# Altium PCB NTC_Extension_6Fach.PcbDoc
Units mm, origin at the board's own origin, x right, y up, seen from the top; angles counter-clockwise.
Board outline 173.75 x 78.79 mm, 2 copper layers (Top Side, not used), stack 0.3 mm thick; 7 components, 13 nets, 34 pads, 0 vias.
Unrouted connection lines stored in the file: 21.
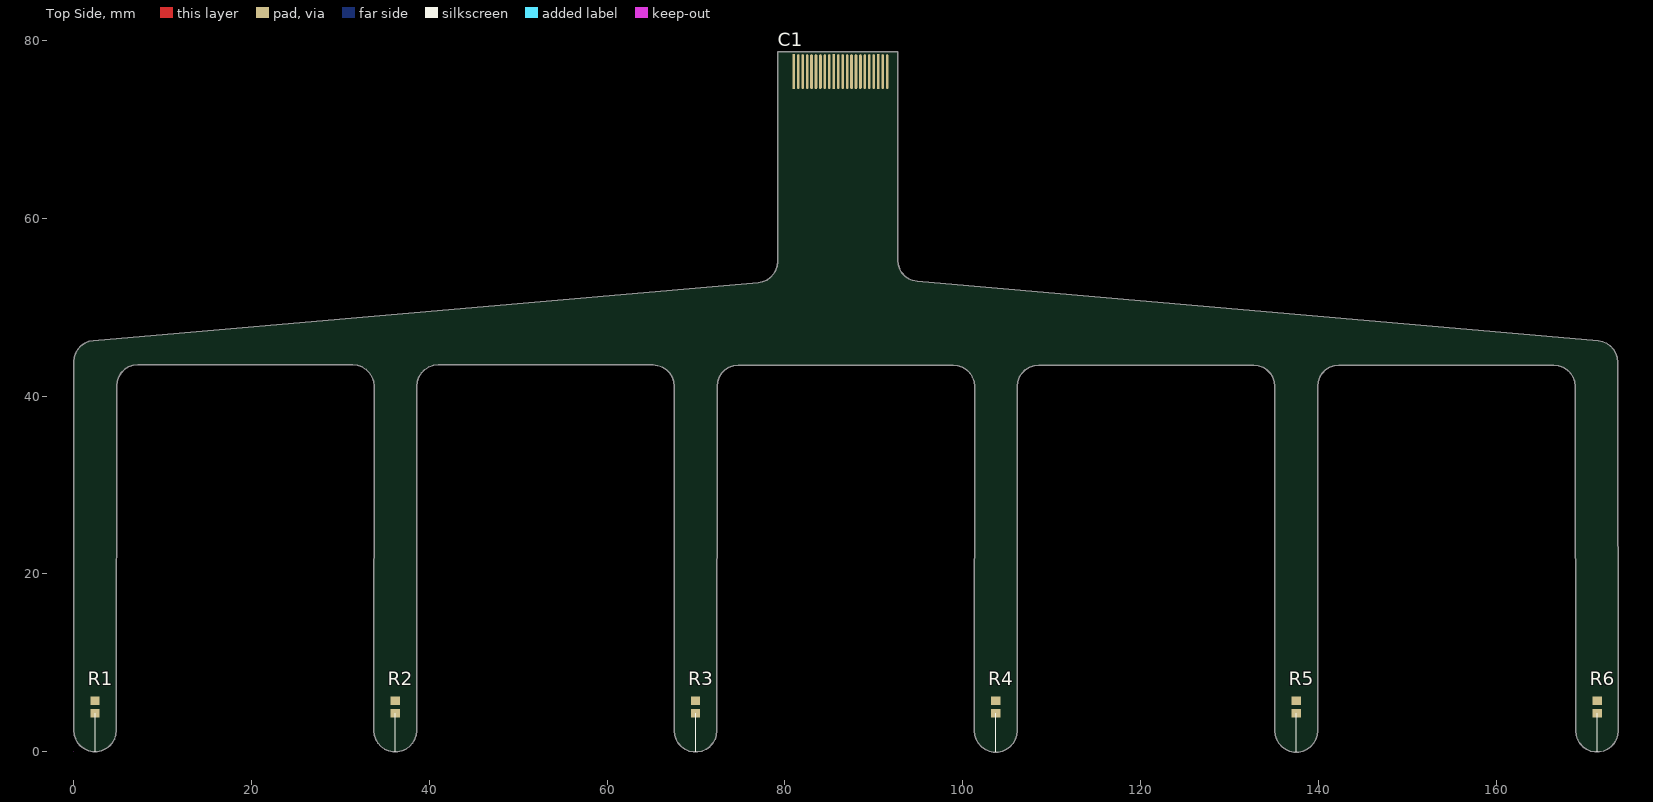
[diagram p0: Top Side view]
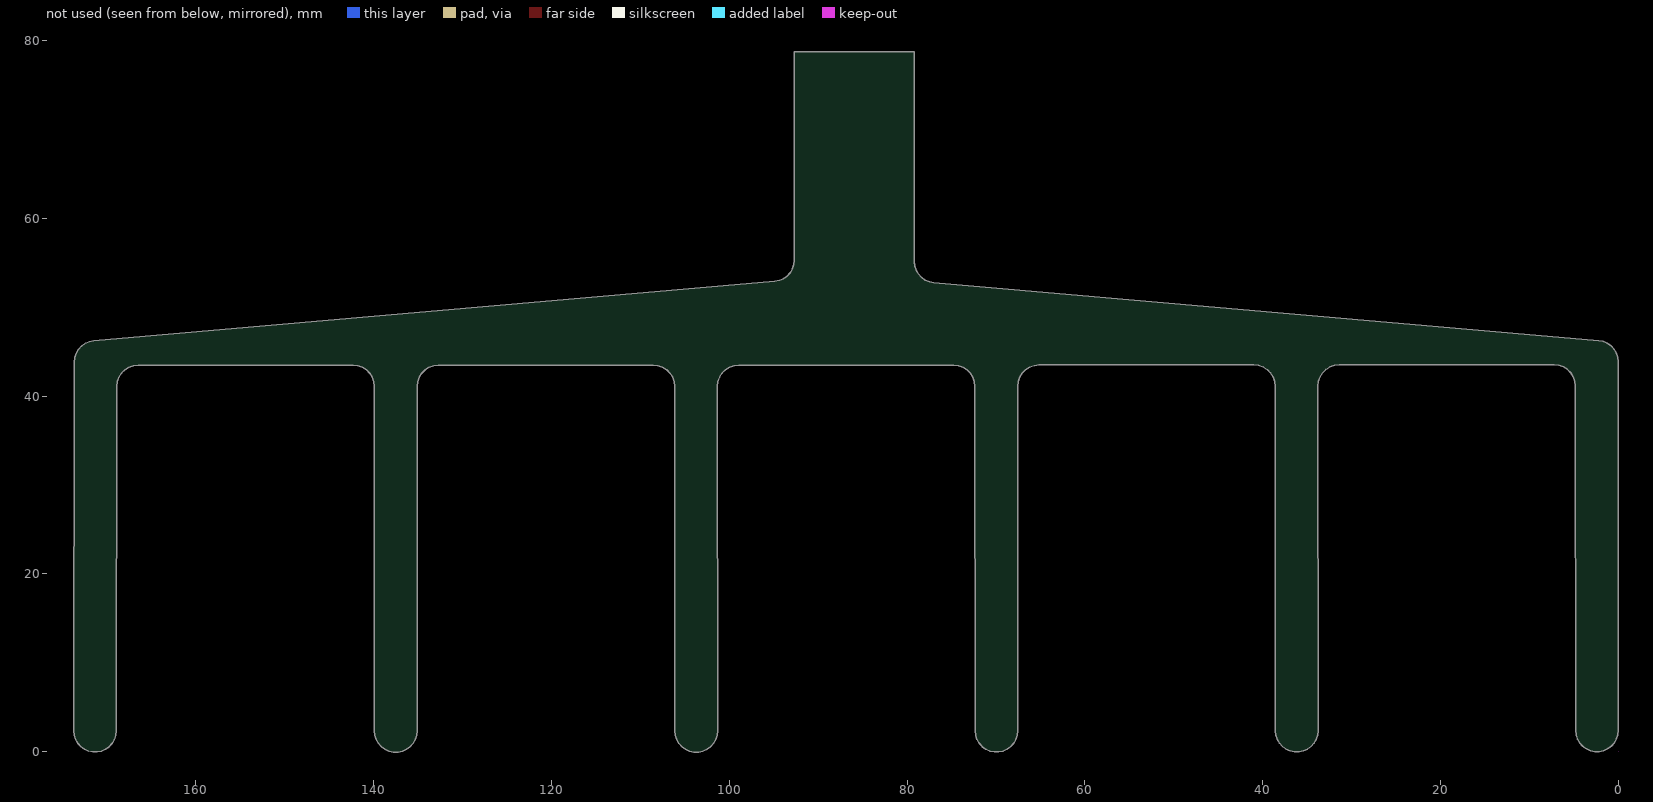
[diagram p1: not used view, seen from below]

## Layer stack, top to bottom
flexible Soldermask Top: solder mask 0.012, FC-001, Dk 4
flexible Soldermask Top: solder mask 0.015, WE-SMFlex-0001, Dk 4.3
Top Side: signal copper 0.035
Polyimide: core 0.05, WE-PI-0103, Dk 3.4
Adhesive: prepreg 0.05, WE-ADH-0001, Dk 4
Stiffener: core 0.15, WE-CO-0043, Dk 4.3
not used: signal copper (thickness not stored)
flexible Soldermask: prepreg 0.015, WE-SMFlex-0001, Dk 4.3

## Board outline
92.691,72.741 92.688,78.738 79.195,78.738 79.191,72.741 79.189,61.815 79.188,55.137 79.134,54.632 78.975,54.15 78.718,53.712 78.375,53.338 77.961,53.045 77.494,52.845 76.996,52.748 2.214,46.243 1.716,46.146 1.249,45.946 0.835,45.652 0.492,45.278 0.235,44.84 0.076,44.358 0.022,43.853 0,2.388 0.052,1.889 0.207,1.412 0.458,0.977 0.793,0.604 1.199,0.309 1.657,0.105 2.148,0 2.65,0 3.141,0.104 3.599,0.308 4.005,0.602 4.341,0.975 4.592,1.41 4.748,1.887 4.8,2.386 4.821,41.127 4.881,41.661 5.059,42.169 5.345,42.623 5.725,43.003 6.18,43.289 6.688,43.466 7.222,43.526 31.396,43.513 31.93,43.453 32.437,43.275 32.892,42.989 33.272,42.609 33.557,42.153 33.735,41.646 33.794,41.112 33.774,2.37 33.827,1.871 33.981,1.394 34.232,0.959 34.568,0.586 34.973,0.291 35.432,0.087 35.922,-0.018 36.424,-0.018 36.915,0.086 37.373,0.29 37.779,0.585 38.115,0.957 38.366,1.392 38.522,1.869 38.574,2.368 38.594,41.109 38.655,41.643 38.833,42.151 39.119,42.606 39.499,42.985 39.954,43.271 40.462,43.448 40.996,43.508 65.17,43.496 65.704,43.436 66.211,43.258 66.666,42.972 67.046,42.592 67.332,42.136 67.509,41.629 67.569,41.095 67.554,2.353 67.606,1.854 67.761,1.377 68.011,0.942 68.347,0.569 68.753,0.274 69.211,0.07 69.702,-0.035 70.203,-0.035 70.694,0.069 71.153,0.273 71.559,0.568 71.895,0.941 72.146,1.375 72.301,1.852 72.354,2.351 72.369,41.093 72.43,41.627 72.607,42.134 72.893,42.589 73.274,42.969 73.729,43.255 74.236,43.432 74.77,43.492 98.944,43.483 99.478,43.423 99.985,43.245 100.44,42.959 100.82,42.579 101.106,42.124 101.284,41.617 101.344,41.083 101.33,2.341 101.382,1.842 101.537,1.365 101.788,0.93 102.123,0.557 102.529,0.262 102.987,0.058 103.478,-0.046 103.98,-0.047 104.471,0.057 104.929,0.261 105.335,0.556 105.671,0.929 105.922,1.363 106.077,1.84 106.13,2.339 106.144,41.081 106.204,41.615 106.382,42.123 106.668,42.578 107.048,42.957 107.503,43.243 108.01,43.421 108.545,43.481 132.719,43.478 133.254,43.418 133.761,43.241 134.216,42.955 134.596,42.575 134.882,42.12 135.06,41.613 135.12,41.079 135.121,2.337 135.174,1.838 135.329,1.361 135.58,0.926 135.916,0.553 136.322,0.258 136.78,0.054 137.271,-0.05 137.772,-0.05 138.263,0.054 138.722,0.259 139.127,0.554 139.463,0.926 139.714,1.361 139.869,1.838 139.921,2.337 139.92,41.079 139.98,41.613 140.158,42.12 140.443,42.575 140.824,42.956 141.279,43.242 141.786,43.419 142.32,43.479 166.495,43.491 167.029,43.431 167.537,43.254 167.992,42.969 168.373,42.589 168.659,42.134 168.837,41.627 168.898,41.093 168.954,2.35 169.007,1.851 169.163,1.374 169.415,0.94 169.751,0.568 170.158,0.273 170.616,0.07 171.107,-0.033 171.609,-0.033 172.1,0.072 172.558,0.277 172.963,0.573 173.298,0.946 173.548,1.381 173.703,1.859 173.754,2.358 173.695,43.822 173.641,44.326 173.482,44.808 173.225,45.246 172.881,45.62 172.467,45.913 172,46.113 171.502,46.21 94.877,52.903 94.379,53.001 93.912,53.201 93.498,53.495 93.155,53.869 92.899,54.307 92.74,54.789 92.687,55.294 92.69,61.811
cut-out: 0,0
cut-out: 0,0
cut-out: 0,0
cut-out: 0,0
cut-out: 0,0
cut-out: 0,0
board region "Default Layer Stack Region": 79.191,72.738 79.191,72.741 79.195,78.738 92.688,78.738 92.691,72.741 92.691,72.738
board region "Default Layer Stack Region": 92.69,61.742 92.687,55.294 92.74,54.789 92.899,54.307 93.155,53.869 93.498,53.495 93.912,53.201 94.379,53.001 94.877,52.903 171.502,46.21 172,46.113 172.467,45.913 172.881,45.62 173.225,45.246 173.482,44.808 173.641,44.326 173.695,43.822 173.754,2.358 173.703,1.859 173.548,1.381 173.298,0.946 172.963,0.573 172.558,0.277 172.1,0.072 171.609,-0.033 171.107,-0.033 170.616,0.07 170.158,0.273 169.751,0.568 169.415,0.94 169.163,1.374 169.007,1.851 168.954,2.35 168.898,41.093 168.837,41.627 168.659,42.134 168.373,42.589 167.992,42.969 167.537,43.254 167.029,43.431 166.495,43.491 142.32,43.479 141.786,43.419 141.279,43.242 140.824,42.955 140.444,42.575 140.158,42.12 139.98,41.613 139.92,41.079 139.921,2.337 139.869,1.838 139.714,1.361 139.463,0.926 139.127,0.554 138.722,0.259 138.263,0.054 137.772,-0.05 137.271,-0.05 136.78,0.054 136.322,0.258 135.916,0.553 135.58,0.926 135.329,1.361 135.174,1.838 135.121,2.337 135.12,41.079 135.06,41.613 134.882,42.12 134.596,42.575 134.216,42.955 133.761,43.241 133.254,43.418 132.719,43.478 108.545,43.481 108.01,43.421 107.503,43.243 107.048,42.957 106.668,42.578 106.382,42.123 106.204,41.615 106.144,41.081 106.13,2.339 106.077,1.84 105.922,1.363 105.671,0.929 105.335,0.556 104.929,0.261 104.471,0.057 103.98,-0.047 103.478,-0.047 102.987,0.058 102.529,0.262 102.123,0.557 101.788,0.93 101.537,1.365 101.382,1.842 101.33,2.341 101.344,41.083 101.284,41.617 101.106,42.124 100.82,42.579 100.44,42.959 99.985,43.245 99.478,43.423 98.944,43.483 74.77,43.492 74.236,43.432 73.729,43.255 73.274,42.969 72.893,42.589 72.607,42.134 72.43,41.627 72.369,41.093 72.354,2.351 72.301,1.852 72.146,1.375 71.895,0.941 71.559,0.568 71.153,0.273 70.694,0.069 70.203,-0.035 69.702,-0.035 69.211,0.07 68.753,0.274 68.347,0.569 68.011,0.942 67.761,1.377 67.606,1.854 67.554,2.353 67.569,41.095 67.509,41.629 67.332,42.136 67.046,42.592 66.666,42.972 66.211,43.258 65.704,43.436 65.17,43.496 40.996,43.508 40.462,43.448 39.954,43.271 39.499,42.985 39.119,42.606 38.833,42.151 38.655,41.643 38.594,41.109 38.574,2.368 38.522,1.869 38.366,1.392 38.115,0.957 37.779,0.585 37.373,0.29 36.915,0.086 36.424,-0.018 35.922,-0.018 35.432,0.087 34.973,0.291 34.568,0.586 34.232,0.959 33.981,1.394 33.827,1.871 33.774,2.37 33.794,41.112 33.735,41.646 33.557,42.153 33.272,42.609 32.892,42.989 32.437,43.275 31.93,43.453 31.396,43.513 7.222,43.526 6.688,43.466 6.18,43.289 5.725,43.003 5.345,42.623 5.059,42.169 4.881,41.661 4.821,41.127 4.8,2.386 4.748,1.887 4.592,1.41 4.341,0.975 4.005,0.602 3.599,0.308 3.141,0.104 2.65,0 2.148,0 1.657,0.105 1.199,0.309 0.793,0.604 0.458,0.977 0.207,1.412 0.052,1.889 0,2.388 0.022,43.853 0.076,44.358 0.235,44.84 0.492,45.278 0.835,45.652 1.249,45.946 1.716,46.146 2.214,46.243 76.996,52.748 77.494,52.845 77.961,53.045 78.375,53.338 78.718,53.712 78.975,54.15 79.134,54.632 79.188,55.137 79.189,61.742
board region "Default Layer Stack Region": 92.691,72.738 92.69,61.811 92.69,61.742 79.189,61.742 79.189,61.815 79.191,72.738

## Design rules (kind name [scope] priority, off if disabled: settings)
Clearance [All] p1: gap=0.1 ignorepadtopadclearanceinfootprint=FALSE
DiffPairsRouting [All] p1: maxlimit=0.254 minlimit=0.254 mostfreqgap=0.254 toplayer_minwidth=0.381 toplayer_maxwidth=0.381 toplayer_prefwidth=0.381 bottomlayer_minwidth=0.381 bottomlayer_maxwidth=0.381 bottomlayer_prefwidth=0.381 substack1={291D20B5-A589-4DCC-A0D5-CD3C578C308D} toplayer_{291d20b5-a589-4dcc-a0d5-cd3c578c308d}_minwidth=0.381 toplayer_{291d20b5-a589-4dcc-a0d5-cd3c578c308d}_maxwidth=0.381 toplayer_{291d20b5-a589-4dcc-a0d5-cd3c578c308d}_prefwidth=0.381 bottomlayer_{291d20b5-a589-4dcc-a0d5-cd3c578c308d}_minwidth=0.381 bottomlayer_{291d20b5-a589-4dcc-a0d5-cd3c578c308d}_maxwidth=0.381 bottomlayer_{291d20b5-a589-4dcc-a0d5-cd3c578c308d}_prefwidth=0.381 maxuncoupledlength=12.7
PolygonConnect PolygonConnect_1 [All vs IsNamedPolygon('GND_L01_P000')] p1: connectstyle=Relief reliefconductorwidth=0.254 reliefentries=4 polygonreliefangle="90 Angle" airgapwidth=0.254
PolygonConnect [All] p2: connectstyle=Relief reliefconductorwidth=0.254 reliefentries=4 polygonreliefangle="90 Angle" airgapwidth=0.254
RoutingVias [All] p1: holewidth=0.711 width=1.27 viastyle="Through Hole" minholewidth=0.711 minwidth=1.27 maxholewidth=0.711 maxwidth=1.27
SolderMaskExpansion [All] p1: expansion=0.102 istentingtop=FALSE
Width [All] p1: maxlimit=0.254 minlimit=0.254 preferedwidth=0.254 substack1={291D20B5-A589-4DCC-A0D5-CD3C578C308D}
29 further rules are at their usual default settings.

## Components (designator, comment, footprint, x,y, rotation, side; value= is the part's Value field where it differs from the comment)
C1 "20Pin Molex FPC" "Molex 20 Pin FPC" 81,76.5 r0 top
R1 "ERT-J1VR103J" RESC1608X90X30ML15T20 2.4,5.018 r90 top
R2 "ERT-J1VR103J" RESC1608X90X30ML15T20 36.17,5.018 r270 top
R3 "ERT-J1VR103J" RESC1608X90X30ML15T20 69.95,5.018 r90 top
R4 "ERT-J1VR103J" RESC1608X90X30ML15T20 103.72,5.018 r90 top
R5 "ERT-J1VR103J" RESC1608X90X30ML15T20 137.53,5.018 r270 top
R6 "ERT-J1VR103J" RESC1608X90X30ML15T20 171.38,5.018 r90 top

## Footprints (in the part's own frame and the unit in brackets; to place one, negate y for a bottom-side part, rotate by r counter-clockwise, add the part's x,y. Pads: shape width x height; smd on the part's side, far side on the other; paste and mask are expansions set on the pad)
"Molex 20 Pin FPC" [mm]
  oval 0.3x3.9 smd: 1(0.5,0) 2(1,0) 3(1.5,0) 4(2,0) 5(2.5,0) 6(3,0) 7(3.5,0) 8(4,0) 10(5,0) 11(5.5,0) 12(6,0) 13(6.5,0) 14(7,0) 15(7.5,0) 16(8,0) 17(8.5,0) 18(9,0) 20(10,0) GND(10.5,0)
  rect 0.3x3.9 smd: 9(4.5,0) 19(9.5,0) GND(0,0)
RESC1608X90X30ML15T20 [mm] "Chip Resistor, 2-Leads, Body 1.60x0.80mm, IPC Low Density"
  rect 0.95x1.05 smd: 1(-0.7,0) 2(0.7,0)
  body extent -0.88,-0.48 0.87,0.48, height 0.9

## Part data
C1: "Flex PCB part for the Molex 20pin FCC"
R1 R2 R3 R4 R5 R6: library part CMP-2000-00869-1, Manufacturer=Panasonic, Part Number=ERT-J1VR103J

## Nets (pads, with @x,y where several pads share a name; then routed paths per layer and width w, separated by ;. In a path a pad name is that pad's centre, name@x,y a point inside that pad or via, vN(x,y) a via of type N, cw(c..) or ccw(c..) an arc to the next point about the centre after c; other vN are vias at no path point)
GND: C1.1 C1.4 C1.7 C1.10 C1.11 C1.14 C1.17 C1.20 C1.GND
NetC1_2: C1.2 R1.2
NetC1_3: C1.3 R1.1
NetC1_5: C1.5 R2.2
NetC1_6: C1.6 R2.1
NetC1_8: C1.8 R3.2
NetC1_9: C1.9 R3.1
NetC1_12: C1.12 R4.2
NetC1_13: C1.13 R4.1
NetC1_15: C1.15 R5.2
NetC1_16: C1.16 R5.1
NetC1_18: C1.18 R6.2
NetC1_19: C1.19 R6.1

## Silkscreen, mask and mechanical layers (free items; w line width, h text height)
Top Overlay:
  lines w0.1: 2.4,0 2.4,4.318 ; 36.17,0 36.17,4.318 ; 69.95,0 69.95,4.318 ; 103.72,0 103.72,4.318 ; 137.53,0 137.53,4.318 ; 171.38,0 171.38,4.318